# Altium PCB joystick_n_7seg.PcbDoc
Units mm, origin at the board's own origin, x right, y up, seen from the top; angles counter-clockwise.
Board outline 66.6 x 53.13 mm, 2 copper layers (Top Layer, Bottom Layer); 22 components, 33 nets, 118 pads, 3 vias.
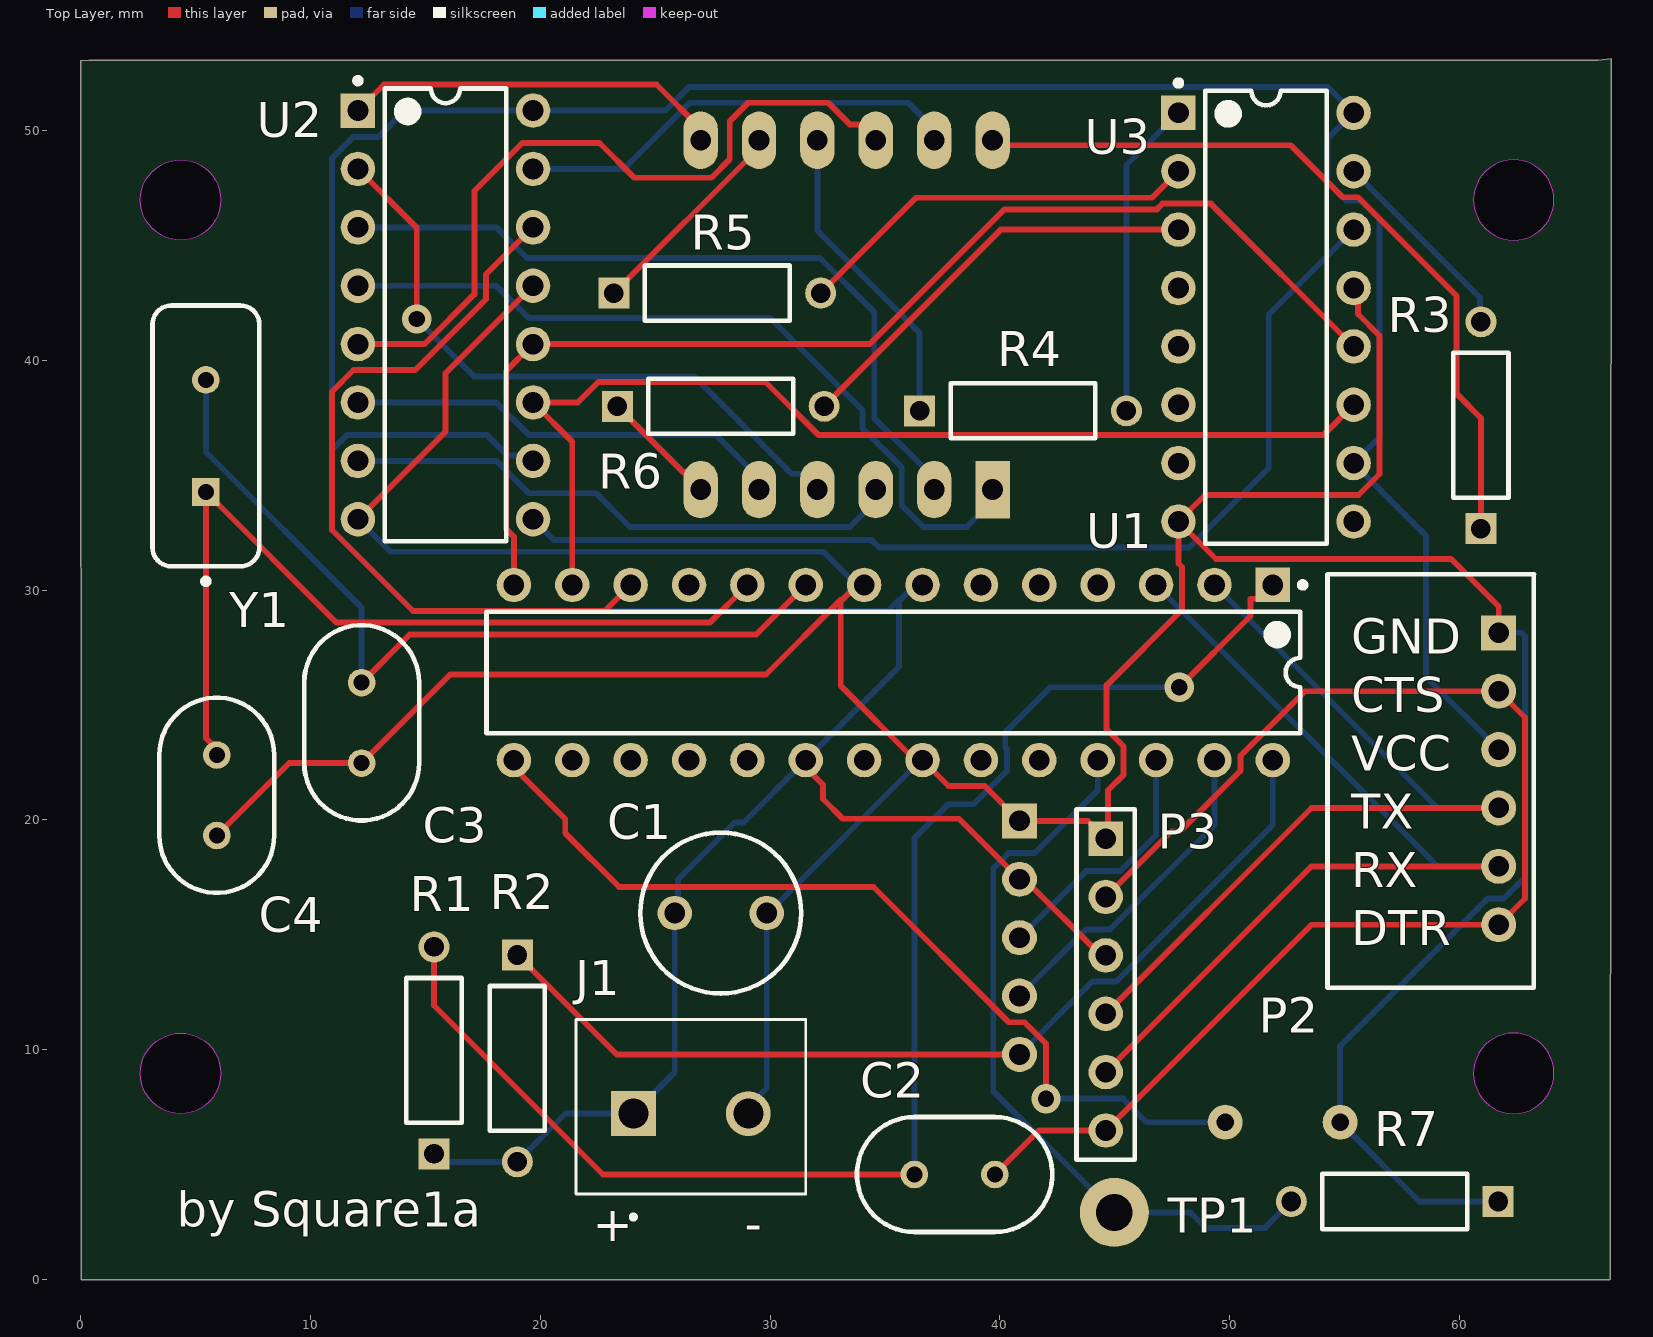
[diagram p0: Top Layer view]
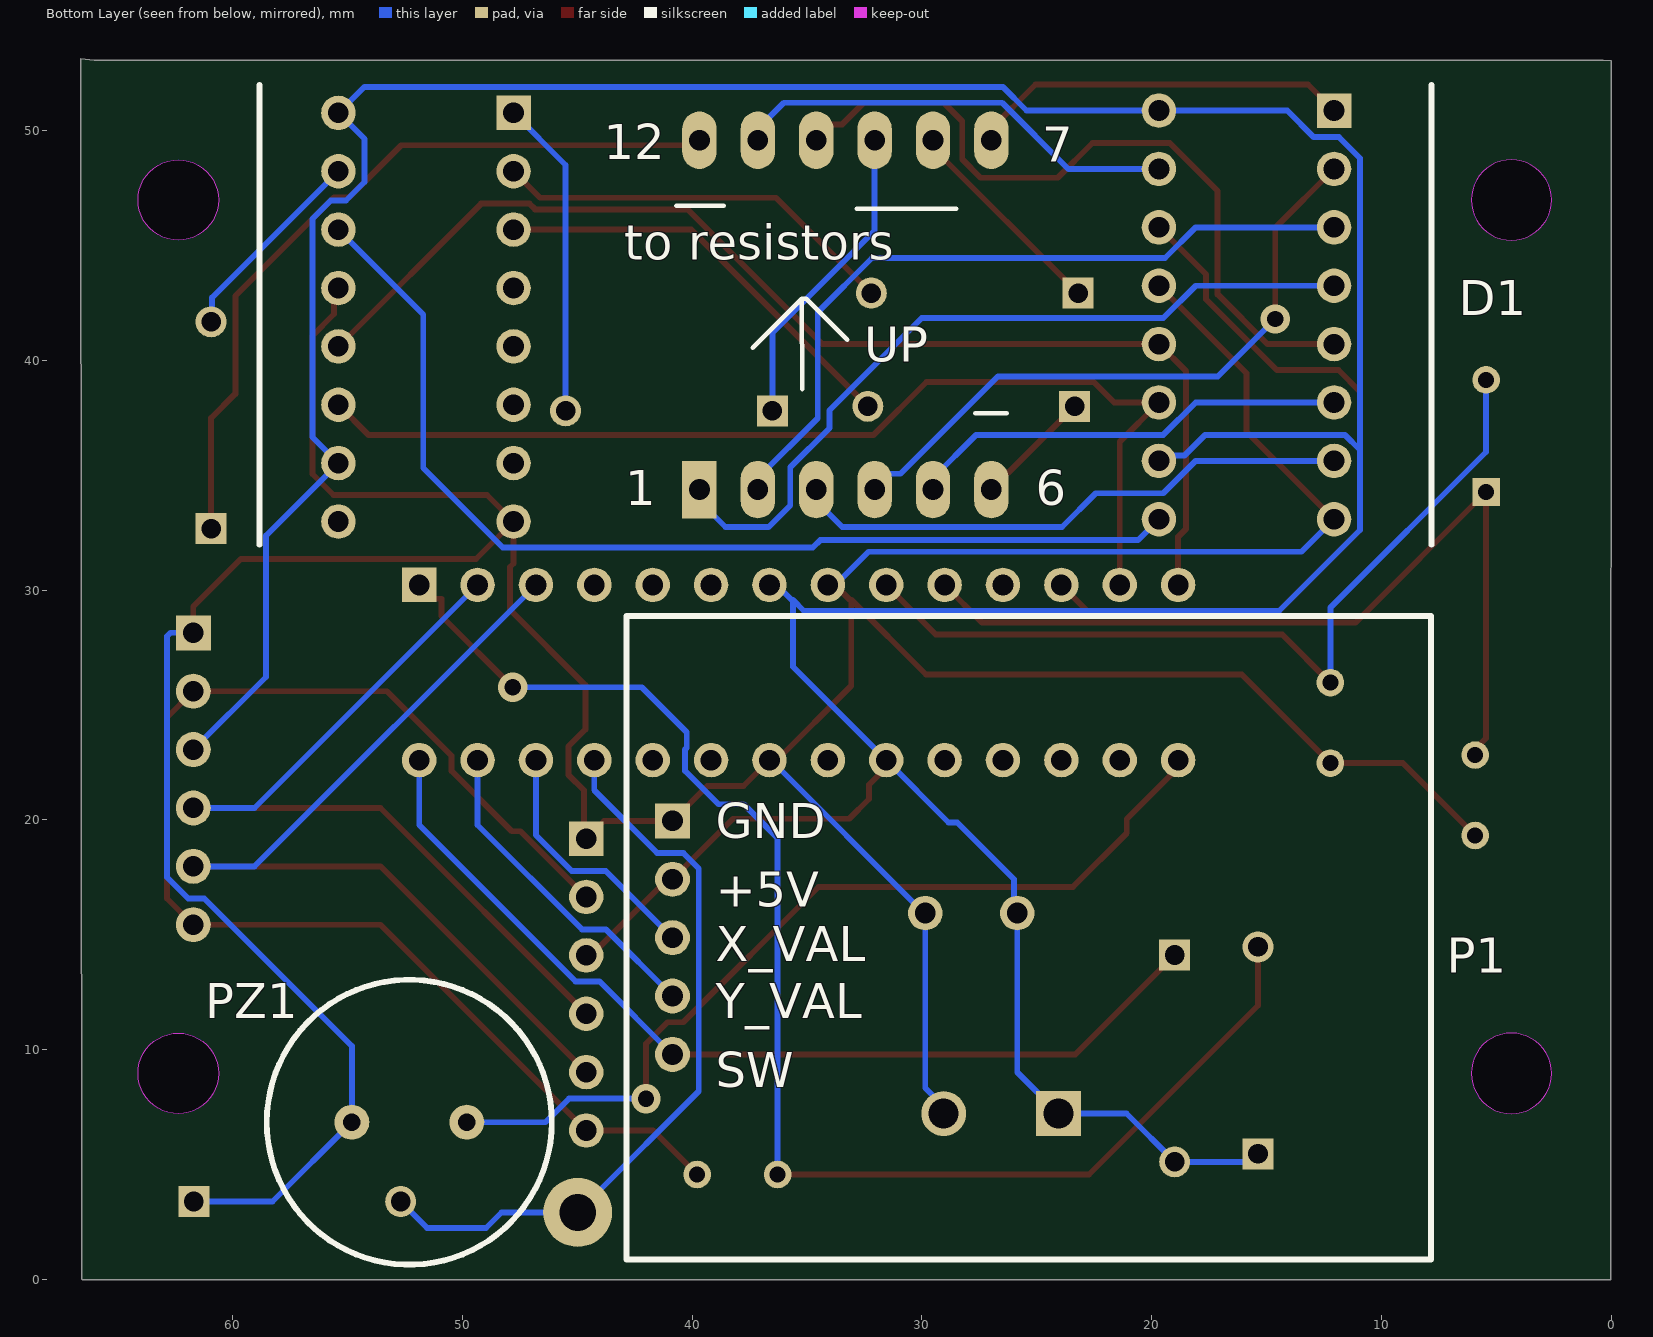
[diagram p1: Bottom Layer view, seen from below]

## Layer stack, top to bottom
Top Solder: solder mask 0.0102, Solder Resist, Dk 3.5
Top Layer: signal copper 0.0356
Dielectric 1: dielectric 0.32, FR-4, Dk 4.8
Bottom Layer: signal copper 0.0356
Bottom Solder: solder mask 0.0102, Solder Resist, Dk 3.5

## Board outline
0.025,0 66.525,0 66.55,0.025 66.6,53.125 66,53.05 0.35,53.05 0,53.025 0.025,8.925
cut-out: 4.35,7.225 cw(c4.35,8.975) 2.6,8.975 cw(c4.35,8.975) 4.35,10.725 cw(c4.35,8.975) 6.1,8.975 cw(c4.35,8.975)
cut-out: 60.6,8.975 ccw(c62.35,8.975) 62.35,7.225 ccw(c62.35,8.975) 64.1,8.975 ccw(c62.35,8.975) 62.35,10.725 ccw(c62.35,8.975)
cut-out: 60.6,46.975 ccw(c62.35,46.975) 62.35,45.225 ccw(c62.35,46.975) 64.1,46.975 ccw(c62.35,46.975) 62.35,48.725 ccw(c62.35,46.975)
cut-out: 4.35,45.225 cw(c4.35,46.975) 2.6,46.975 cw(c4.35,46.975) 4.35,48.725 cw(c4.35,46.975) 6.1,46.975 cw(c4.35,46.975)

## Design rules (kind name [scope] priority, off if disabled: settings)
Clearance [All] p1: gap=0.254 ignorepadtopadclearanceinfootprint=FALSE except(0: Arc-Hole Track-Hole SMDPad-Hole THPad-Hole Via-Hole Fill-Hole Poly-Hole Region-Hole Text-Hole)
PolygonConnect [All] p1: connectstyle=Relief reliefconductorwidth=0.254 reliefentries=4 polygonreliefangle="90 Angle" airgapwidth=0.254
RoomDefinition U_7_seg_display [InComponentClass('U_7_seg_display')] p1: confinementstyle=ConfineIn formatcopy=TRUE lockcomponents=FALSE outline -3.951,-0.025 107.5,-0.025 107.5,77.625 -3.951,77.625
RoomDefinition joystick_n_7seg [InComponentClass('joystick_n_7seg')] p2: confinementstyle=ConfineIn formatcopy=TRUE lockcomponents=FALSE outline -4.15,0.173 123.206,0.173 123.206,72.55 -4.15,72.55
RoutingVias [All] p1: holewidth=0.711 width=1.27 viastyle="Through Hole" minholewidth=0.711 minwidth=1.27 maxholewidth=0.711 maxwidth=1.27
SolderMaskExpansion [All] p1: expansion=0.102 istentingtop=FALSE
Width [All] p1: maxlimit=2.54 minlimit=0.254 preferedwidth=0.254 minimp=50.000000 maximp=50.000000 favimp=50.000000
30 further rules are at their usual default settings.

## Classes and differential pairs
component class joystick_n_7seg: C1 C2 C3 C4 J1 P1 P2 P3 PZ1 R1 R2 R7 TP1 U1 Y1
component class U_7_seg_display: D1 R3 R4 R5 R6 U2 U3

## Components (designator, comment, footprint, x,y, rotation, side; value= is the part's Value field where it differs from the comment)
C1 "10uF" electrolytic_capacitor 29.85,15.95 r180 top
C2 "100nF" "Ceramic Capacitor" 36.275,4.575 r0 top
C3 "22pF" "Ceramic Capacitor" 12.225,25.975 r270 top
C4 "22pF" "Ceramic Capacitor" 5.925,22.825 r270 top
D1 "4 digit display" "7 SEG DISPLAY (DIP12)" 39.675,34.375 r90 bottom
J1 "TB002-500-02BE" CUI_TB002-500-02BE 24.05,7.225 r0 top
P1 "joystick_5_socket" joystick 40.85,19.96 r180 bottom
P2 "USB_TTL_6_socket" "TTL USB (6 SOCKETS)" 61.698,28.143 r0 top
P3 "Header 6" HDR1X6 44.6,19.19 r270 top
PZ1 "Piezo Buzzer" Buzzer 52.3,6.85 r180 bottom
R1 "10k" RESA60-630X240 15.375,9.975 r90 top
R2 "2K" RESA60-630X240 19,9.625 r270 top
R3 "330R" RESA60-630X240 60.925,37.175 r90 top
R4 "330R" RESA60-630X240 41,37.8 r0 top
R5 "330R" RESA60-630X240 27.7,42.925 r0 top
R6 "330R" RESA60-630X240 27.85,38 r0 top
R7 "330R" RESA60-630X240 57.175,3.4 r180 top
TP1 "(+5V)" TEST_POINT 44.975,2.925 r0 top
U1 "ATmega328-PU" 28P3 35.36,26.415 r270 top
U2 "SN74HC595N" N0016A 15.875,41.975 r0 top
U3 "SN74HC595N" N0016A 51.575,41.875 r0 top
Y1 "FOXSLF/160-20" FOX-FOXSLF160-20 5.45,36.71 r90 top

## Footprints (in the part's own frame and the unit in brackets; to place one, negate y for a bottom-side part, rotate by r counter-clockwise, add the part's x,y. Pads: shape width x height; smd on the part's side, far side on the other; paste and mask are expansions set on the pad)
"7 SEG DISPLAY (DIP12)" [mm]
  rect 2.5x1.5 hole 0.9: 1(0,0)
  oval 2.5x1.5 hole 0.9: 2(0,-2.54) 3(0,-5.08) 4(0,-7.62) 5(0,-10.16) 6(0,-12.7) 7(15.2,-12.7) 8(15.2,-10.16) 9(15.2,-7.62) 10(15.2,-5.08) 11(15.2,-2.54) 12(15.2,0)
  silkscreen extent -2.4,-31.85 17.6,19.15
28P3 [mm] "28-Pin Plastic Dual In-Line Package (PDIP)"
  rect 1.5x1.5 hole 0.9: 1(-3.81,16.51)
  round 1.5 hole 0.9: 2(-3.81,13.97) 3(-3.81,11.43) 4(-3.81,8.89) 5(-3.81,6.35) 6(-3.81,3.81) 7(-3.81,1.27) 8(-3.81,-1.27) 9(-3.81,-3.81) 10(-3.81,-6.35) 11(-3.81,-8.89) 12(-3.81,-11.43) 13(-3.81,-13.97) 14(-3.81,-16.51) 15(3.81,-16.51) 16(3.81,-13.97) 17(3.81,-11.43) 18(3.81,-8.89) 19(3.81,-6.35) 20(3.81,-3.81) 21(3.81,-1.27) 22(3.81,1.27) 23(3.81,3.81) 24(3.81,6.35) 25(3.81,8.89) 26(3.81,11.43) 27(3.81,13.97) 28(3.81,16.51)
  silkscreen extent -3.93,-17.7 2.65,17.94, body extent -3.6,-17.65 3.6,17.65, height 4.58
Buzzer [mil]
  round 60 hole 30: 1(-98.43,0) 2(98.43,0)
  silkscreen extent -244,-244 244,244
"Ceramic Capacitor" [mm]
  round 1.2 hole 0.7: 1(0,0) 2(3.5,0)
  silkscreen extent -2.5,-2.5 6,2.5
CUI_TB002-500-02BE [mm]
  rect 1.95x1.95 / inner round 1.95 / far side rect 1.95x1.95 hole 1.3: 1(0,0)
  round 1.95 hole 1.3: 2(5,0)
  silkscreen extent -2.5,-4.6 7.5,4.1
electrolytic_capacitor [mm]
  round 1.5 hole 0.9: 1(0,0) 2(4,0)
  silkscreen extent -1.5,-3.5 5.5,3.5
FOX-FOXSLF160-20 [mm] "THD, 2-Leads, Body 11.35x4.65mm"
  rect 1.2x1.2 hole 0.7: 1(-2.44,0)
  round 1.2 hole 0.7: 2(2.44,0)
  silkscreen extent -6.45,-2.32 5.68,2.32, body extent -5.67,-2.32 5.68,2.33, height 3.6
HDR1X6 [mm] "Connector; Header; 6 Position"
  rect 1.5x1.5 hole 0.9: 1(0,0)
  round 1.5 hole 0.9: 2(2.54,0) 3(5.08,0) 4(7.62,0) 5(10.16,0) 6(12.7,0)
  silkscreen extent -1.27,-1.27 13.97,1.27
joystick [mil]
  rect 60x60 hole 35.43: 1(0,0)
  round 60 hole 35.43: 2(0,-100) 3(0,-200) 4(0,-300) 5(0,-400)
  silkscreen extent -79,-751 1299,351
N0016A [mm] "DIP, 16-Leads, Body 19.7x6.6mm, Pitch 2.54mm"
  rect 1.5x1.5 hole 0.9: 1(-3.81,8.89)
  round 1.5 hole 0.9: 2(-3.81,6.35) 3(-3.81,3.81) 4(-3.81,1.27) 5(-3.81,-1.27) 6(-3.81,-3.81) 7(-3.81,-6.35) 8(-3.81,-8.89) 9(3.81,-8.89) 10(3.81,-6.35) 11(3.81,-3.81) 12(3.81,-1.27) 13(3.81,1.27) 14(3.81,3.81) 15(3.81,6.35) 16(3.81,8.89)
  silkscreen extent -3.93,-9.85 2.65,10.31, body extent -3.95,-9.85 3.95,9.85, height 5.08
RESA60-630X240 [mm] "Axial Resistor, 2-Leads, Dia 2.4mm, Body Length 6.3mm"
  rect 1.35x1.35 hole 0.85: 1(-4.5,0)
  round 1.35 hole 0.85: 2(4.5,0)
  silkscreen extent -3.15,-1.2 3.15,1.2, body extent -3.15,-1.2 3.15,1.2, height 2.4
TEST_POINT [mm]
  round 3 hole 1.6: 1(0,0)
"TTL USB (6 SOCKETS)" [mil]
  rect 60x60 hole 35: 1(0,0)
  round 60 hole 35: 2(0,-100) 3(0,-200) 4(0,-300) 5(0,-400) 6(0,-500)
  silkscreen extent -293,-608 61,100

## Part data
C1: library part "electrolytic capacitor"
C2 C3 C4: library part capacitor
D1: library part LTC-5723HR, "Displays Segmented Panel 4DIGIT 32LED Hi-Eff. Red CC 12-Pin DIP", Case/Package=DIP, Forward Current=20mA, Forward Voltage=2V, Illumination Color=Red, Manufacturer="Vishay Lite-On", Max Operating Temperature=85°C, Min Operating Temperature=-35°C, Package Quantity=10, Power Consumption=75mW, Reverse Voltage=5V, Supplier Part Number 1=859-LTC-5723HR, Test Current=10mA, Category="LED Displays", ComponentLink1Description=https://datasheet.ciiva.com/6355/s-110-c5723hr-6355372.pdf?src-supplier=Digi-Key, ComponentLink1URL=https://datasheet.ciiva.com/6355/s-110-c5723hr-6355372.pdf?src-supplier=Digi-Key, Depth=19mm, Display Type=Segment, Dominant Wavelength=623nm, Element Configuration="Common Cathode", Length=50.3mm, Manufacturer Part Number=LTC-5723HR, Mount="Through Hole", Number of Elements=32, Number of Pins=12, Operating Supply Voltage=2V, Packaging=Rail/Tube, Power Dissipation=75mW, Pricing 1="1=2.97000, 10=2.09000, 50=2.09000, 100=1.71000, 1000=1.32000, 10000=1.25000 (USD)", RoHS=Yes, RoHS Compliant=Yes, Stock 1=897, Supplier 1=Mouser, Viewing Area (height)=14.2mm, Viewing Area Length=8.1mm, Wavelength=623nm
J1: "2~24 Poles, Screw Type, Horizontal, 5.0 Pitch, 22~12 (AWG), Terminal Block Connector", Package=None, Availability="In Stock", Check_prices=https://www.snapeda.com/parts/TB002-500-02BE/CUI+Devices/view-part/?ref=eda, CUI_purchase_URL=https://www.cuidevices.com/product/interconnect/connectors/terminal-blocks/tb002-500-series?utm_source=snapeda.com&utm_medium=referral&utm_campaign=snapedaBOM, MF="CUI Devices", MP=TB002-500-02BE, Price=None, Purchase-URL=https://pricing.snapeda.com/search/part/TB002-500-02BE/?ref=eda, SnapEDA_Link=https://www.snapeda.com/parts/TB002-500-02BE/CUI+Devices/view-part/?ref=snap
P2: Supplier Part Number 1=1621310, Supplier 1=Rs
P3: "Header, 6-Pin", LatestRevisionDate=17-Jul-2002, LatestRevisionNote="Re-released for DXP Platform.", Publisher="Altium Limited"
PZ1: library part TP124005-2, "High Temp Piezo Transducer; Resonant Frequency: 4000Hz; Rated Voltage: 5V; SPL @ 10cm: 75dBA", Manufacturer="DB Unlimited", Supplier Part Number 1=2104-TP124005-2CT-ND, Category="Audio Products", Manufacturer Part Number=TP124005-2, Pricing 1="1=0.78000, 10=0.64900, 25=0.60120, 50=0.56620, 100=0.53260 (USD)", RoHS=No, Stock 1=2115, Supplier 1=Digi-Key
R1 R2 R3 R4 R5 R6 R7: library part CMP-1659-00073-1, "Axial Resistor, 100 KOhm, +/- 1%, 0.25 W, -55 to 155 degC, 2-Pin THD, RoHS, Bulk", Case\Package=Axial, Max Operating Temperature="155 degC", Min Operating Temperature="-55 degC", Package Quantity=200, Power Rating="250 mW", Resistance="475 Ohm", Tolerance=1%, Voltage Rating="250 V", ComponentLink1Description="Manufacturer URL", ComponentLink1URL=http://www.yageo.com/, ComponentLink2Description=Datasheet, ComponentLink2URL=http://www.yageo.com/documents/recent/Yageo%20LR_MFR_2013.pdf, DatasheetVersion=Apr-13, Length="0.248 inch", Mount="Through Hole", PackageDescription="2-Pin Axial Lead, Dia 2.4 mm, Body Length 6.3 mm", PackageReference=MFR-25, Packaging=Bulk, RoHSCompliant=true
TP1: library part Testpoint, "Polyurethane Multi-Purpose Cream Adhesive, 10.3 oz Cartridge", Color=Red, Flammability Rating="UL94 V-0", Manufacturer="Keystone Electronics", Manufacturer Part Number=5010, Package Quantity=100, Supplier Part Number 1=36-5010-ND, Body Material=Bronze,PBT, Category=Connectors, ComponentLink1Description=https://datasheet.ciiva.com/11744/0900766b8009b7c7-11744920.pdf?src-supplier=RSComponents, ComponentLink1URL=https://datasheet.ciiva.com/11744/0900766b8009b7c7-11744920.pdf?src-supplier=RSComponents, ComponentLink2Description=https://datasheet.ciiva.com/16506/m60-2p60-16506972.pdf?src-supplier=Future+Electronics, ComponentLink2URL=https://datasheet.ciiva.com/16506/m60-2p60-16506972.pdf?src-supplier=Future+Electronics, ComponentLink3Description=https://datasheet.ciiva.com/16883/70182825-16883886.pdf?src-supplier=Allied+Electronics, ComponentLink3URL=https://datasheet.ciiva.com/16883/70182825-16883886.pdf?src-supplier=Allied+Electronics, ComponentLink4Description=https://datasheet.ciiva.com/1454/1703983-1454833.pdf?src-supplier=Element14, ComponentLink4URL=https://datasheet.ciiva.com/1454/1703983-1454833.pdf?src-supplier=Element14, ComponentLink5Description=https://datasheet.ciiva.com/22631/1703983-22631113.pdf?src-supplier=Element14, ComponentLink5URL=https://datasheet.ciiva.com/22631/1703983-22631113.pdf?src-supplier=Element14, ComponentLink6Description=https://datasheet.ciiva.com/2917/5010-2917626.pdf?src-supplier=Digi-Key, ComponentLink6URL=https://datasheet.ciiva.com/2917/5010-2917626.pdf?src-supplier=Digi-Key, Contact Material=Bronze, Contact Plating=Silver,Tin, Height=0.445inch, Hole Diameter=1.6mm, Housing Color=Red, Inside Diameter=1.78mm, Insulation Material=Nylon, Lead Free="Lead Free", Length=11.3mm, Material=Nylon,Bronze,Silver, Mount="Through Hole,PCB", Number of Ports=1, Orientation=Straight, Packaging=Bulk, Plating=Silver, Pricing 1="1=0.42000, 25=0.34080, 100=0.30150, 250=0.28304, 500=0.25230, 1000=0.19884, 2500=0.18180, 5000=0.17044 (USD)", REACH SVHC="No SVHC", RoHS=Yes, RoHS Compliant=Yes, Series=THM, Stock 1=546313, Supplier 1=Digi-Key, Termination="Through Hole"
U1: library part CMP-0095-00015-2, "8-bit AVR Microcontroller, 32KB Flash, 1KB EEPROM, 2KB SRAM, 28-pin PDIP, Industrial Grade (-40°C to 85°C)", ComponentLink1Description="Manufacturer URL", ComponentLink1URL=http://www.atmel.com/, ComponentLink2Description="ATmega48A/48PA/88A/88PA/168A/168PA/328/328P Datasheet", ComponentLink2URL=http://www.atmel.com/dyn/resources/prod_documents/8271.pdf, ComponentLink3Description="ATmega48A/48PA/88A/88PA/168A/168PA/328/328P Summary", ComponentLink3URL=http://www.atmel.com/dyn/resources/prod_documents/8271S.pdf, DatasheetVersion="revD, May-2011", PackageDescription="28-lead (0.300\"/7.62mm Wide) Plastic Dual Inline Package (PDIP)", PackageReference=28P3, PackageVersion="revB, Sep-2001", RevisionNote="DatasheetVersion updated. URLs added."
U2 U3: library part CMP-0780-00137-3, "8-Bit Shift Registers With 3-State Output Registers, N0016A, TUBE", F @ Nom Voltage(Max)(Mhz)=28, Generic Part Number=SN74HC595, ICC @ Nom Voltage(Max)(mA)=0.08, Manufacturer="Texas Instruments", Operating Temperature Range(C)="-40 to 85", Rating=Military, tpd @ Nom Voltage(Max)(ns)=34, Voltage(Nom)(V)=6, 3-State Output=Yes, Bits=8, Code_JEDEC=MS-001, DatasheetVersion=SCLS041H, Input Type=CMOS, Output Drive (IOL/IOH)(Max)(mA)=7.8/-7.8, Output Type=CMOS, PackageReference=N0016A, PackageVersion=http://www.ti.com/lit/ml/mpdi002c/mpdi002c.pdf, Technology Family=HC, VCC(Max)(V)=6, VCC(Min)(V)=2
Y1: library part CMP-1749-00003-1, "Resistance Weld Thru-Hole Crystal, 16 MHz, -20 to 70 degC, 2-Pin THD, RoHS, Bulk", Case\Package=Axial, Max Operating Temperature="155 degC", Min Operating Temperature="-55 degC", Package Quantity=200, Power Rating="250 mW", Resistance="221 kohm", Tolerance=1%, Voltage Rating="250 V", ComponentLink1Description="Manufacturer URL", ComponentLink1URL=http://www.foxonline.com/, ComponentLink2Description=Datasheet, ComponentLink2URL=http://www.foxonline.com/pdfs/hc49slf.pdf, DatasheetVersion=Mar-15, Length="0.248 inch", Mount="Through Hole", PackageDescription="2-Pin Through Hole Device, Body 11.35 x 4.65 mm", PackageReference=FOXSLF160-20, Packaging=Bulk, RoHSCompliant=true

## Via types
v1: diameter 1.27, hole 0.711, Top Layer to Bottom Layer, 3 vias

## Nets (pads, with @x,y where several pads share a name; then routed paths per layer and width w, separated by ;. In a path a pad name is that pad's centre, name@x,y a point inside that pad or via, vN(x,y) a via of type N, cw(c..) or ccw(c..) an arc to the next point about the centre after c; other vN are vias at no path point)
A: D1.11 U2.15 | length 19.6
  Bottom Layer w0.254: U2.15 23.626,48.325 26.507,51.206 36.004,51.206 37.135,50.075 D1.11
B: D1.7 U2.1 | length 16.7
  Top Layer w0.254: U2.1 13.196,51.996 25.054,51.996 26.975,50.075 D1.7
C: D1.4 U2.2 | length 28.2
  Top Layer w0.254: U2.2 14.625,45.765 v1(14.625,41.8)
  Bottom Layer w0.254: v1(14.625,41.8) 17.129,39.296 26.693,39.296 30.924,35.065 31.479,35.065 32.055,34.49 D1.4
CTS: C2.2 P2.2 P2.6 P3.2 P3.6 | length 58.7
  Top Layer w0.254: C2.2 41.69,6.49 P3.6 53.553,15.443 P2.6 62.841,16.586 62.841,24.46 P2.2 53.269,25.603 50.461,22.795 50.461,22.137 47.837,19.512 47.462,19.512 P3.2
D: D1.2 U2.3 | length 32.8
  Bottom Layer w0.254: U2.3 18.086,45.785 19.416,44.454 32.164,44.454 34.53,42.088 34.53,37.48 37.135,34.875 D1.2
DIGIT1: D1.12 R3.1 | length 33.6
  Top Layer w0.254: D1.12 39.894,49.356 52.655,49.356 54.917,47.094 55.575,47.094 59.869,42.8 59.869,38.54 60.925,37.484 R3.1
DIGIT2: D1.9 R4.1 | length 13.6
  Bottom Layer w0.254: D1.9 32.055,45.646 36.5,41.201 R4.1
DIGIT3: D1.8 R5.1 | length 9.3
  Top Layer w0.254: R5.1 29.515,49.24 D1.8
DIGIT4: D1.6 R6.1 | length 5.2
  Top Layer w0.254: R6.1 26.237,35.113 26.399,35.113 26.975,34.538 D1.6
DP: D1.3 U2.7 | length 24.7
  Bottom Layer w0.254: U2.7 18.086,35.625 19.495,34.216 22.431,34.216 23.903,32.744 33.464,32.744 34.595,33.875 D1.3
E: D1.1 U2.4 | length 34.4
  Bottom Layer w0.254: U2.4 18.086,43.245 19.495,41.836 30.007,41.836 34.022,37.821 34.022,37.047 35.726,35.343 35.726,33.685 36.667,32.744 38.544,32.744 39.675,33.875 D1.1
F: D1.10 U2.5 | length 32.5
  Top Layer w0.254: U2.5 14.967,40.705 17.131,42.869 17.131,47.371 19.217,49.456 22.574,49.456 24.086,47.944 27.443,47.944 28.245,48.746 28.245,50.404 29.047,51.206 32.523,51.206 33.464,50.265 34.019,50.265 34.595,49.69 D1.10
G: D1.5 U2.6 | length 19.3
  Bottom Layer w0.254: U2.6 18.086,38.165 19.495,36.756 27.634,36.756 29.515,34.875 D1.5
GND: C1.1 C3.2 C4.2 J1.2 P1.1 P2.1 P3.1 PZ1.1 R7.1 U1.8 U1.22 U2.8 U2.13 U3.8 U3.13 | length 190.9
  Top Layer w0.254: C4.2 9.075,22.475 C3.2 16.084,26.334 29.824,26.334 33.07,29.58 ; U2.8 15.875,36.895 15.875,39.435 U2.13 ; U1.8 33.781,30.225 33.136,29.58 33.07,29.58 ; U3.13 55.575,42.955 55.575,42.014 56.516,41.073 56.516,35.057 55.599,34.14 48.92,34.14 U3.8 ; P2.1 61.698,29.286 59.628,31.356 49.394,31.356 U3.8 ; 33.07,29.58 33.07,25.84 36.305,22.605 U1.22 37.761,21.474 39.336,21.474 P1.1 43.83,19.96 P3.1 44.7,19.29 44.7,21.29 45.381,21.971 45.381,23.198 44.639,23.94 44.639,25.867 47.921,29.149 47.921,31.005 47.765,31.161 U3.8
  Bottom Layer w0.254: U2.8 13.483,31.667 32.323,31.667 33.765,30.225 U1.8 ; J1.2 29.05,7.543 29.85,8.343 29.85,16.075 30.037,16.075 36.567,22.605 U1.22 ; R7.1 58.25,3.4 PZ1.1 54.8,10.161 61.225,16.586 61.917,16.586 62.841,17.51 62.841,27.994 62.692,28.143 P2.1
NetC3_1: C3.1 U1.9 Y1.2 | length 37.1
  Top Layer w0.254: C3.1 14.321,28.071 29.396,28.071 U1.9
  Bottom Layer w0.254: Y1.2 5.45,36.009 12.225,29.234 C3.1
NetC4_1: C4.1 U1.10 Y1.1 | length 38.2
  Top Layer w0.254: C4.1 5.925,23.081 5.45,23.556 Y1.1 11.134,28.586 27.371,28.586 U1.10
NetPZ1_2: PZ1.2 U1.15 | length 39.4
  Top Layer w0.254: U1.15 18.85,22.28 21.084,20.046 21.084,19.426 23.429,17.081 34.493,17.081 40.377,11.197 41.069,11.197 42,10.266 v1(42,7.875)
  Bottom Layer w0.254: v1(42,7.875) 45.353,7.875 46.378,6.85 PZ1.2
NetR3_2: R3.2 U3.15 | length 8.8
  Bottom Layer w0.254: U3.15 60.879,42.731 60.879,41.721 R3.2
NetR4_2: R4.2 U3.1 | length 13.9
  Bottom Layer w0.254: R4.2 45.5,48.5 U3.1
NetR5_2: R5.2 U3.2 | length 17.8
  Top Layer w0.254: R5.2 36.35,47.075 46.615,47.075 U3.2
NetR6_2: R6.2 U3.3 | length 18.6
  Top Layer w0.254: R6.2 40.035,45.685 U3.3
NetR7_2: R7.2 TP1.1 U1.25 | length 33.9
  Bottom Layer w0.254: U1.25 44.25,21.297 41.516,18.563 40.377,18.563 39.707,17.893 39.707,8.193 44.35,3.55 TP1.1@44.35,2.925 ; TP1.1 TP1.1@44.35,2.925 ; R7.2 51.525,2.25 48.959,2.25 48.284,2.925 TP1.1@44.35,2.925
NetU2_9: U2.9 U3.14 | length 45.9
  Bottom Layer w0.254: U2.9 20.595,32.175 34.422,32.175 34.743,31.854 48.233,31.854 51.69,35.311 51.69,41.99 U3.14
PB0: U1.14 U2.12 U3.12 | length 51.9
  Top Layer w0.254: U1.14 18.85,32.321 18.5,32.671 18.5,39.52 U2.12 34.337,40.705 40.199,46.567 46.825,46.567 47.074,46.816 49.174,46.816 U3.12
PC3: P1.3 U1.26 | length 11.1
  Bottom Layer w0.254: P1.3 43.751,17.781 45.23,17.781 46.79,19.341 U1.26
PC4: P1.4 U1.27 | length 14.4
  Bottom Layer w0.254: P1.4 43.751,15.241 44.79,15.241 49.33,19.781 U1.27
PC5: P1.5 R2.1 U1.28 | length 41.6
  Top Layer w0.254: R2.1 23.325,9.8 P1.5
  Bottom Layer w0.254: P1.5 44.029,12.979 45.068,12.979 51.87,19.781 U1.28
PD6: U1.12 U2.14 | length 33.3
  Top Layer w0.254: U2.14 17.639,43.739 17.639,42.659 14.554,39.574 11.875,39.574 10.934,38.633 10.934,32.617 14.457,29.094 22.799,29.094 U1.12
PD7: U1.13 U2.11 U3.11 | length 46.2
  Top Layer w0.254: U1.13 21.39,36.46 U2.11 21.626,38.165 22.517,39.056 29.801,39.056 32.113,36.744 54.064,36.744 U3.11
RESET: C2.1 R1.2 U1.1 | length 62.8
  Top Layer w0.254: R1.2 15.375,11.925 22.725,4.575 C2.1 ; v1(47.8,25.775) 50.897,28.872 50.897,29.627 51.272,29.627 U1.1
  Bottom Layer w0.254: C2.1 36.275,19.206 37.753,20.684 38.848,20.684 40.301,22.137 40.301,23.073 40.229,23.145 40.229,23.818 42.186,25.775 v1(47.8,25.775)
RX: P2.4 P3.4 U1.2 | length 37.2
  Top Layer w0.254: P3.4 53.553,20.523 P2.4
  Bottom Layer w0.254: U1.2 59.032,20.523 P2.4
TX: P2.5 P3.5 U1.3 | length 40.8
  Top Layer w0.254: P3.5 53.553,17.983 P2.5
  Bottom Layer w0.254: U1.3 59.032,17.983 P2.5
VCC: C1.2 J1.1 P1.2 P2.3 P3.3 R1.1 R2.2 U1.7 U1.20 U2.10 U2.16 U3.10 U3.16 | length 186.3
  Top Layer w0.254: U1.20 31.55,22.28 32.298,21.532 32.298,20.912 33.158,20.052 38.218,20.052 P1.2 41.07,17.42 44.38,14.11 P3.3
  Bottom Layer w0.254: R1.1 15.725,5.125 R2.2 21.1,7.225 J1.1 25.85,9.025 C1.2 25.988,16.088 25.988,17.418 28.462,19.892 28.837,19.892 U1.20 35.61,26.665 35.61,29.58 ; U2.10 19.447,35.863 18.566,35.863 17.673,36.756 11.597,36.756 10.934,36.093 ; U1.7 36.321,30.225 35.676,29.58 35.61,29.58 ; P2.3 58.539,26.222 58.539,32.371 U3.10 56.516,36.656 56.516,46.153 55.714,46.955 55.056,46.955 54.254,47.757 54.254,49.634 U3.16 54.254,51.896 26.478,51.896 25.447,50.865 U2.16 14.104,50.865 12.949,49.71 11.851,49.71 10.934,48.793 10.934,36.093 ; 10.934,36.093 10.934,32.617 14.457,29.094 35.124,29.094 35.61,29.58
pads on no net: U1.4 U1.5 U1.6 U1.11 U1.16 U1.17 U1.18 U1.19 U1.21 U1.23 U1.24 U3.4 U3.5 U3.6 U3.7 U3.9

## Silkscreen, mask and mechanical layers (free items; w line width, h text height)
Top Overlay:
  text "by Square1a" at 4.179,2.312 h1.52
Mechanical 1:
  circle w0.254: c62.35,46.975 r1.75
  circle w0.254: c62.35,8.975 r1.75
  circle w0.254: c4.35,8.975 r1.75
  circle w0.254: c4.35,46.975 r1.75
  lines w0.2: 0.325,53.05 66,53.05 66.6,53.125 66.55,0.025 ; 0.35,53.05 0,53.025 0.025,8.925 0.025,0 66.525,0

## Text inside footprints (layer, text, board x,y; h text height)
D1: Bottom Overlay "UP" at 32.496,39.929 h1.52; Bottom Overlay "to resistors" at 42.946,44.379 h1.52; Bottom Overlay "1" at 42.896,33.704 h1.52; Bottom Overlay "12" at 43.846,48.754 h1.52; Bottom Overlay "6" at 25.046,33.704 h1.52; Bottom Overlay "7" at 24.771,48.629 h1.52
J1: Top Overlay "+" at 22.279,1.675 h1.52; Top Overlay "-" at 28.904,1.692 h1.52
P1: Bottom Overlay "SW" at 38.971,8.364 h1.52; Bottom Overlay "Y_VAL" at 38.971,11.368 h1.52; Bottom Overlay "X_VAL" at 38.971,13.843 h1.52; Bottom Overlay "+5V" at 38.971,16.214 h1.52; Bottom Overlay "GND" at 38.971,19.214 h1.52
P2: Top Overlay "DTR" at 55.277,14.547 h1.52; Top Overlay "RX" at 55.277,17.082 h1.52; Top Overlay "TX" at 55.277,19.617 h1.52; Top Overlay "VCC" at 55.277,22.152 h1.52; Top Overlay "CTS" at 55.277,24.687 h1.52; Top Overlay "GND" at 55.277,27.222 h1.52